# EAGLE board HW3 (EAGLE 5.12)
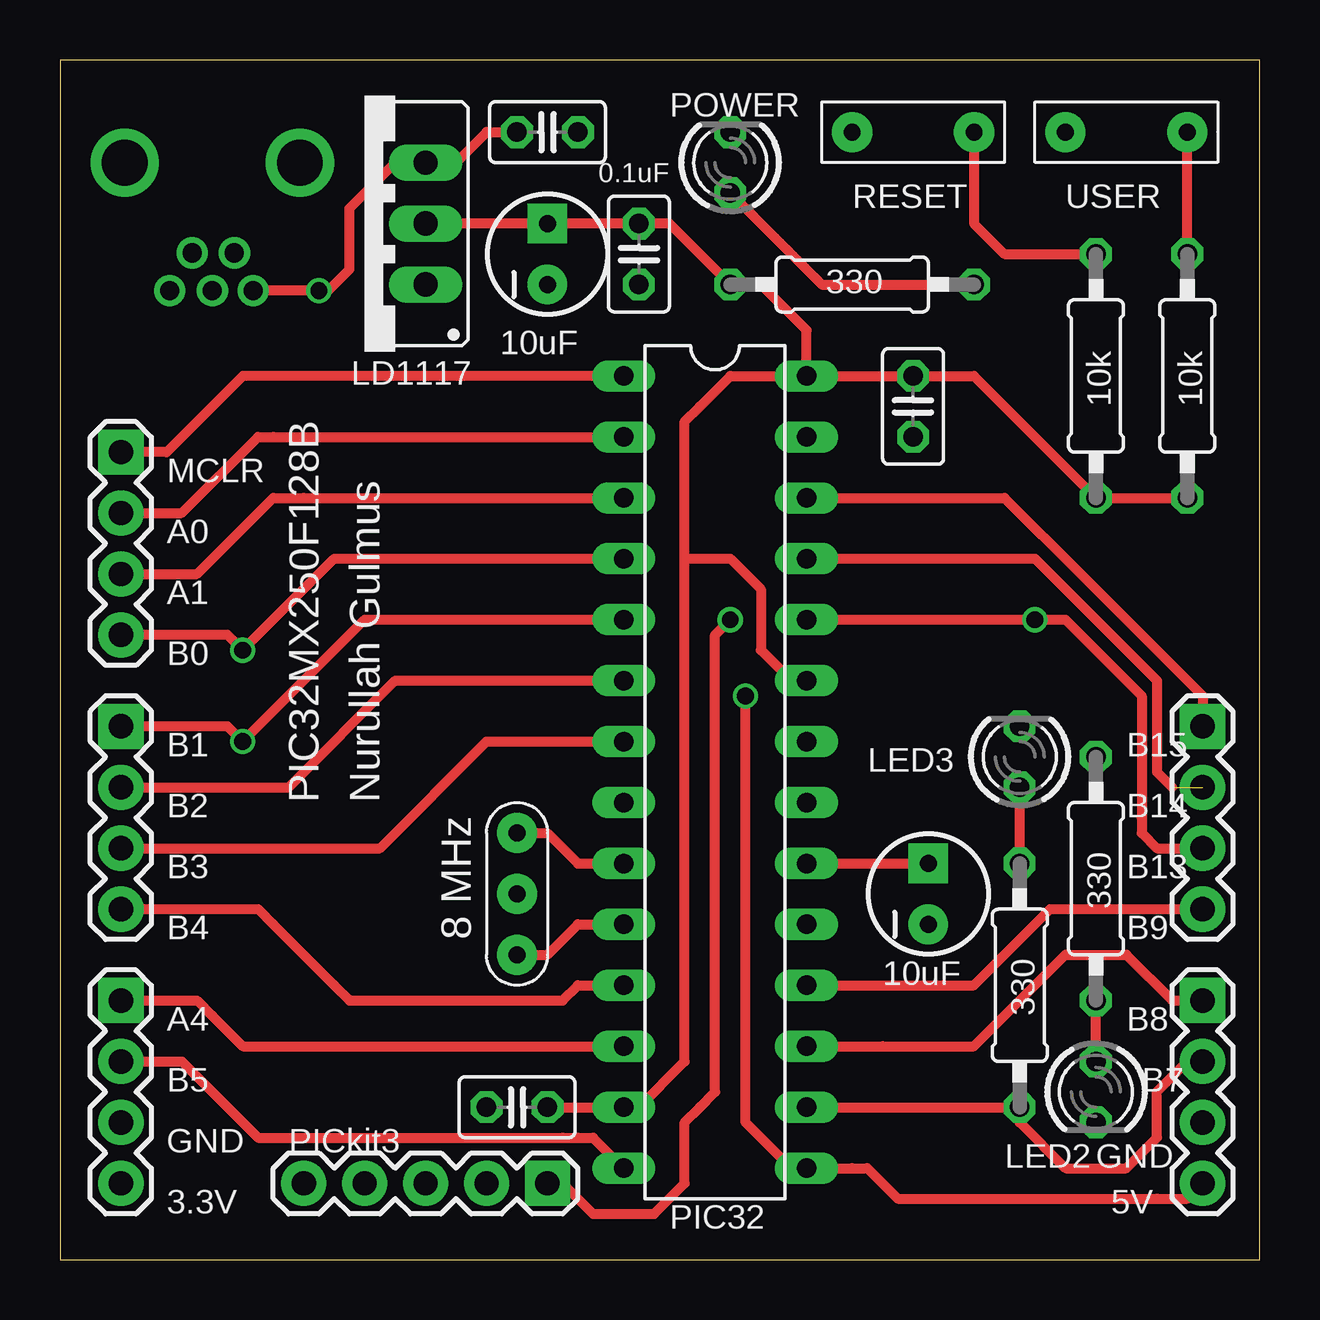
[diagram p0: board, top side]
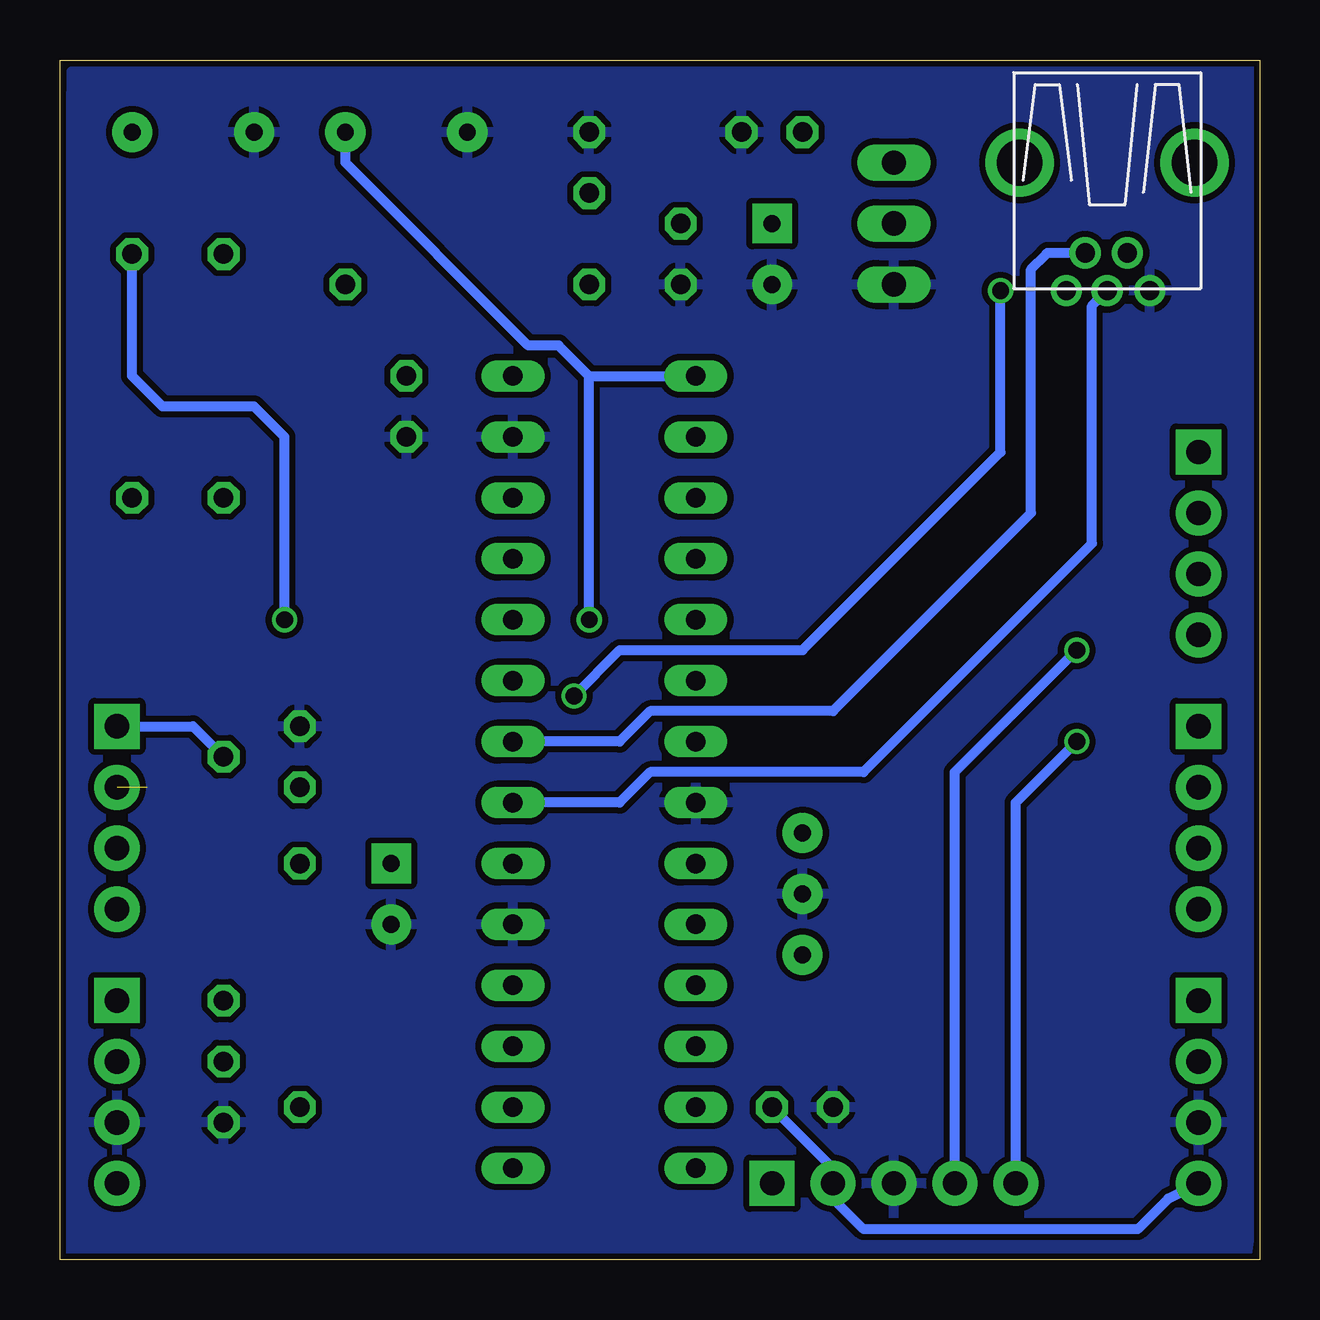
[diagram p1: board, bottom side, seen from below]

Size 50 x 50 mm. Coordinates in mm from the lower left corner, seen from the top.
Outline: 0,0 50,0 50,50 0,50 0,0
Copper layers (1*16): Top 0.035mm / dielectric 1.5mm / Bottom 0.035mm
Design rules "SeeedStudio_2layer_DRU_no_angle_20140221": minimum track width 6mil, minimum drill 12mil, track to track 6mil, track to pad 6mil, pad to pad 6mil, via to via 6mil, smd to smd 0mil, copper to edge 10mil, drill to drill 10mil, minimum pad ring 10mil, minimum via ring 6mil, stop-mask expansion 2mil, vias tented up to drill 100mil, thermal gap 10mil

## Footprints (pad centres in the part's own frame; a part is rotated, then mirrored left to right if it is on the bottom)
C025-025X050 = drill 0.813 octagon: 1 -1.27,0; 2 1.27,0
LED3MM = drill 0.813 octagon: A -1.27,0; K 1.27,0
0207/10 = drill 0.813 octagon: 1 -5.08,0; 2 5.08,0
DIL28-3 = drill 0.813 long: 1 -16.51,-3.81; 2 -13.97,-3.81; 3 -11.43,-3.81; 4 -8.89,-3.81; 5 -6.35,-3.81; 6 -3.81,-3.81; 7 -1.27,-3.81; 8 1.27,-3.81; 9 3.81,-3.81; 10 6.35,-3.81; 11 8.89,-3.81; 12 11.43,-3.81; 13 13.97,-3.81; 14 16.51,-3.81; 15 16.51,3.81; 16 13.97,3.81; 17 11.43,3.81; 18 8.89,3.81; 19 6.35,3.81; 20 3.81,3.81; 21 1.27,3.81; 22 -1.27,3.81; 23 -3.81,3.81; 24 -6.35,3.81; 25 -8.89,3.81; 26 -11.43,3.81; 27 -13.97,3.81; 28 -16.51,3.81
CRYSTAL = drill 0.7 pad 1.676 round: 1 -2.54,0; 2 0,0; 3 2.54,0
BUTTON = drill 0.7 pad 1.676 round: 1 -2.54,0; 2 2.54,0
TO220 = drill 1.016 long: 1 -2.54,0; 2 0,0; 3 2.54,0
CAP_POL_D = drill 0.7 pad 1.651 square: 1 1.27,0 | drill 0.7 pad 1.651 round: 2 -1.27,0
USB-MINIB = drill 0.8 round: D+ 4.064,0; D- 2.489,0.914; GND 4.064,-1.778; ID 2.489,-0.838; VBUS 4.064,1.702 | drill 1.9 round: P$6 -1.27,-3.65; P$7 -1.27,3.65
1X05 = drill 1.016 pad 1.88 square: 1 0,0 | drill 1.016 pad 1.88 round: 2 2.54,0; 3 5.08,0; 4 7.62,0; 5 10.16,0
1X04 = drill 1.016 pad 1.88 square: 1 0,0 | drill 1.016 pad 1.88 round: 2 2.54,0; 3 5.08,0; 4 7.62,0

## Placement (x,y rotation side)
C1  0.1 uF  [C025-025X050]  20.32,46.99 180 top
C2  0.1 uF  [C025-025X050]  24.13,41.91 90 top
C3  0.1uF  [C025-025X050]  35.56,35.56 90 top
C4  0.1 uF  [C025-025X050]  19.05,6.35 0 top
LED2  [LED3MM]  27.94,45.72 90 top
LED3  [LED3MM]  43.18,6.99 270 top
LED4  [LED3MM]  40.01,20.95 90 top
R1  330 ohm  [0207/10]  33.02,40.64 180 top
R2  10k ohm  [0207/10]  43.18,36.83 270 top
R3  330 ohm  [0207/10]  43.18,15.88 90 top
R4  330  [0207/10]  40.01,11.43 270 top
R5  10 k  [0207/10]  46.99,36.83 270 top
U$1  PIC32MX250F128B  [DIL28-3]  27.3,20.32 270 top
U$2  8MHZ_CRYSTAL  [CRYSTAL]  19.05,15.24 270 top
U$3  BUTTON  [BUTTON]  35.56,46.99 180 top
U$4  LD1117  [TO220]  15.24,43.18 90 top
U$5  CAP_POL  [CAP_POL_D]  36.2,15.24 90 top
U$6  USB  [USB-MINIB]  6.35,44.45 270 top
U$7  PICKIT3  [1X05]  20.32,3.17 180 top
U$10  10 uF  [CAP_POL_D]  20.32,41.91 90 top
U$12  BUTTON  [BUTTON]  44.45,46.99 180 top
U$13  1X04_HEADER  [1X04]  2.54,33.66 270 top
U$14  1X04_HEADER  [1X04]  2.54,22.23 270 top
U$15  1X04_HEADER  [1X04]  2.54,10.79 270 top
U$16  1X04_HEADER  [1X04]  47.62,10.79 270 top
U$17  1X04_HEADER  [1X04]  47.62,22.23 270 top

## Library data of the parts
C1-C4 LED2-LED4 R1-R5 U$1-U$7 U$10 U$12-U$17 = ME433

## Nets
3.3V: C2.2 C3.2 C4.2 R1.2 R2.2 R5.2 U$1.13 U$1.23 U$1.28 U$4.2 U$7.2 U$10.1 U$15.4
5V: C1.2 U$1.15 U$4.3 U$6.VBUS U$16.4
A0: U$1.2 U$13.2
A1: U$1.3 U$13.3
A4: U$1.12 U$15.1
B0: U$1.4 U$7.4 U$13.4
B1: U$1.5 U$7.5 U$14.1
B2: U$1.6 U$14.2
B3: U$1.7 U$14.3
B4: U$1.11 U$14.4
B5: U$1.14 U$15.2
B7: R4.2 U$1.16 U$16.2
B8: U$1.17 U$16.1
B9: U$1.18 U$17.4
B13: R5.1 U$1.24 U$12.1 U$17.3
B14: U$1.25 U$17.2
B15: R3.2 U$1.26 U$17.1
D+: U$1.21 U$6.D+
D-: U$1.22 U$6.D-
GND: C1.1 C2.1 C3.1 C4.1 LED2.K LED3.K LED4.K U$1.8 U$1.19 U$1.27 U$2.2 U$3.2 U$4.1 U$5.2 U$6.GND U$7.3 U$10.2 U$12.2 U$15.3 U$16.3
MCLR: R2.1 U$1.1 U$3.1 U$7.1 U$13.1
N$1: U$1.9 U$2.1
N$2: U$1.10 U$2.3
N$3: LED2.A R1.1
N$4: U$1.20 U$5.1
N$9: LED3.A R3.1
N$10: LED4.A R4.1

## Tracks (layer width: path | path; a pad name or v marks a point on that pad's centre or on a via)
3.3V
  Top 0.406: U$1.28 C3.2 38.1,36.83 R2.2 R5.2 | U$4.2 U$10.1 C2.2 25.4,43.18 R1.2 29.21,40.64 31.11,38.73 U$1.28 | 26.04,29.21 26.04,8.26 24.13,6.35 U$1.13 C4.2 | 26.04,29.21 26.04,34.92 26.67,35.56 27.94,36.83 U$1.28 | U$1.23 30.48,24.13 29.21,25.4 29.21,27.94 27.94,29.21 26.04,29.21
  Bottom 0.406: C4.2 17.78,3.81 U$7.2 17.78,2.54 16.51,1.27 5.08,1.27 3.81,2.54 U$15.4
5V  (via drill 0.7)
  Top 0.406: v10.79,40.39 U$6.VBUS | v10.79,40.39 11.18,40.39 | 11.18,40.39 11.43,40.64 | 11.43,40.64 12.06,41.27 12.06,43.81 13.97,45.72 U$4.3 16.51,45.72 17.78,46.99 C1.2 | v28.57,23.5 28.57,5.71 30.48,3.81 U$1.15 33.02,3.81 33.66,3.81 34.29,3.17 34.92,2.54 45.72,2.54 46.99,2.54 U$16.4 | v10.79,40.39 11.18,40.39 | 11.18,40.39 11.43,40.64
  Bottom 0.406: v28.57,23.5 26.67,25.4 19.05,25.4 15.24,29.21 10.79,33.66 v10.79,40.39
A0
  Top 0.406: U$1.2 8.89,34.29 8.26,34.29 5.08,31.11 U$13.2
A1
  Top 0.406: U$1.3 10.16,31.75 8.89,31.75 5.71,28.57 U$13.3
A4
  Top 0.406: U$1.12 7.62,8.89 6.35,10.16 5.71,10.79 U$15.1
B0  (via drill 0.7 pad 0.25)
  Top 0.406: U$1.4 11.43,29.21 v7.62,25.4 6.99,26.04 U$13.4
  Bottom 0.406: U$7.4 12.7,20.32 v7.62,25.4
B1  (via drill 0.7 pad 0.25)
  Top 0.406: U$1.5 12.7,26.67 v7.62,21.59 6.99,22.23 U$14.1
  Bottom 0.406: U$7.5 10.16,19.05 v7.62,21.59
B2
  Top 0.406: U$1.6 13.97,24.13 9.53,19.68 U$14.2
B3
  Top 0.406: U$1.7 19.05,21.59 17.78,21.59 13.34,17.14 U$14.3
B4
  Top 0.406: U$1.11 21.59,11.43 20.95,10.79 12.06,10.79 11.43,11.43 8.89,13.97 8.26,14.61 U$14.4
B5
  Top 0.406: U$15.2 5.08,8.26 5.71,7.62 8.26,5.08 20.95,5.08 21.59,5.08 22.23,5.08 U$1.14
B7
  Top 0.406: U$1.16 R4.2 40.01,5.71 41.91,3.81 44.45,3.81 45.72,5.08 45.72,6.99 46.99,8.26 U$16.2
B8
  Top 0.406: U$1.17 34.29,8.89 38.1,8.89 41.91,12.7 44.45,12.7 46.35,10.79 U$16.1
B9
  Top 0.406: U$1.18 36.83,11.43 38.1,11.43 40.64,13.97 41.27,14.61 U$17.4
B13  (via drill 0.7)
  Top 0.406: R5.1 U$12.1 | U$1.24 v40.64,26.67 41.91,26.67 45.09,23.5 45.09,18.41 45.09,17.78 45.72,17.14 U$17.3
  Bottom 0.406: R5.1 46.99,36.83 45.72,35.56 41.91,35.56 40.64,34.29 v40.64,26.67
B14  (1 unrouted)
  Top 0.406: U$1.25 40.64,29.21 45.72,24.13 45.72,20.32 46.35,19.68
B15
  Top 0.406: U$1.26 31.75,31.75 39.37,31.75 42.55,28.57 47.62,23.5 U$17.1
  Bottom 0.406: R3.2 44.45,22.23 U$17.1
D+
  Bottom 0.406: U$1.21 26.67,19.05 25.4,20.32 16.51,20.32 6.99,29.84 6.99,39.75 U$6.D+
D-
  Bottom 0.406: U$6.D- 8.84,41.96 8.89,41.91 9.53,41.27 9.53,31.11 10.16,30.48 10.79,29.84 11.43,29.21 17.78,22.86 25.4,22.86 26.67,21.59 U$1.22
GND
  pour Bottom (isolate 0.254): 0,49.53 49.53,49.53 50.16,-0.64 0.64,-0.64 0,3.81
MCLR  (via drill 0.7 pad 0.25)
  Top 0.406: U$1.1 7.62,36.83 4.45,33.66 U$13.1 | R2.1 39.37,41.91 38.1,43.18 U$3.1 | v27.94,26.67 27.3,26.04 27.3,6.99 26.67,6.35 26.04,5.71 26.04,3.17 24.77,1.91 22.23,1.91 20.95,3.17 U$7.1
  Bottom 0.406: U$3.1 38.1,45.72 30.48,38.1 29.21,38.1 27.94,36.83 | 27.94,36.83 U$1.1 | v27.94,26.67 27.94,36.83
N$1
  Top 0.406: U$2.1 20.32,17.78 21.59,16.51 U$1.9
N$2
  Top 0.406: U$2.3 20.32,12.7 21.59,13.97 U$1.10
N$3
  Top 0.406: LED2.A 31.75,40.64 R1.1
N$4
  Top 0.406: U$1.20 U$5.1
N$9
  Top 0.406: LED3.A R3.1
N$10
  Top 0.406: R4.1 LED4.A

## Text on the board
tPlace: POWER | 0.1uF | RESET | USER | 330 | 10uF | LD1117 | 10k | 10k | MCLR | A0 | A1 | B0 | B1 | B15 | LED3 | PIC32MX250F128B | Nurullah Gulmus | B2 | B14 | B3 | B13 | 330 | B4 | 8 MHz | B9 | 10uF | A4 | 330 | B8 | B5 | B7 | GND | PICkit3 | LED2 | GND | 3.3V | 5V | PIC32